# EAGLE board motor_driver_ver3.9 (EAGLE 6.2)
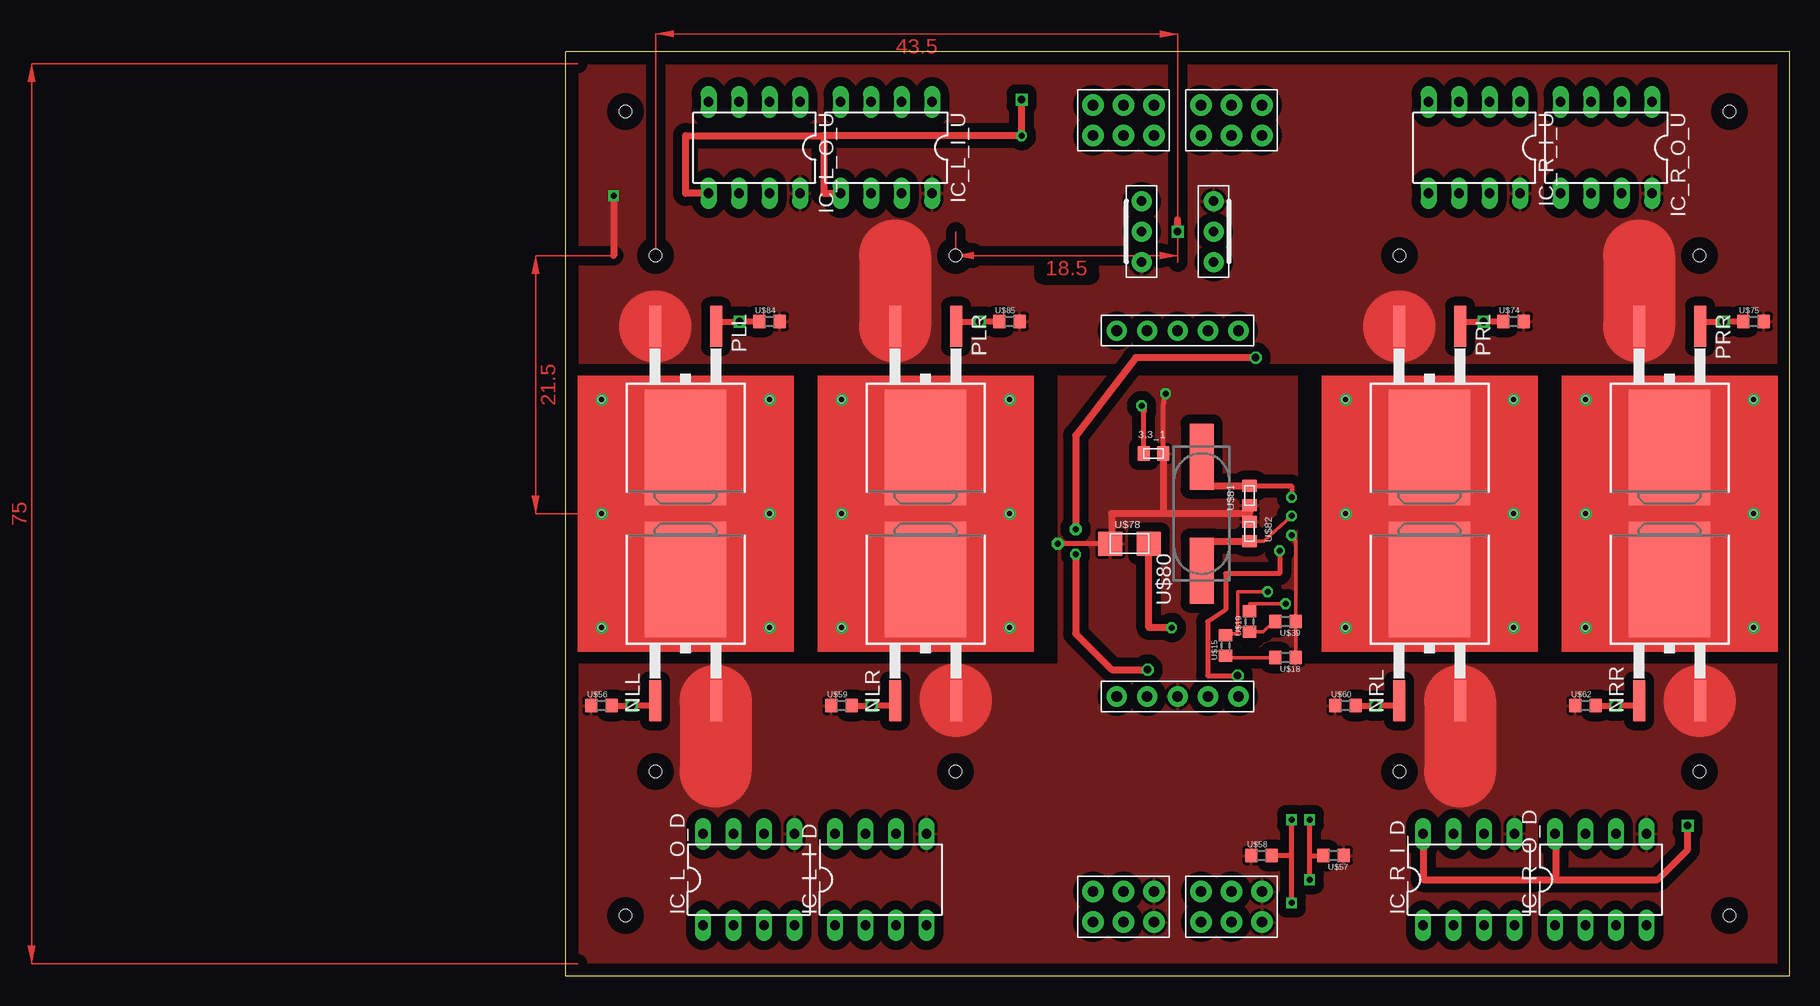
[diagram p0: board, top side]
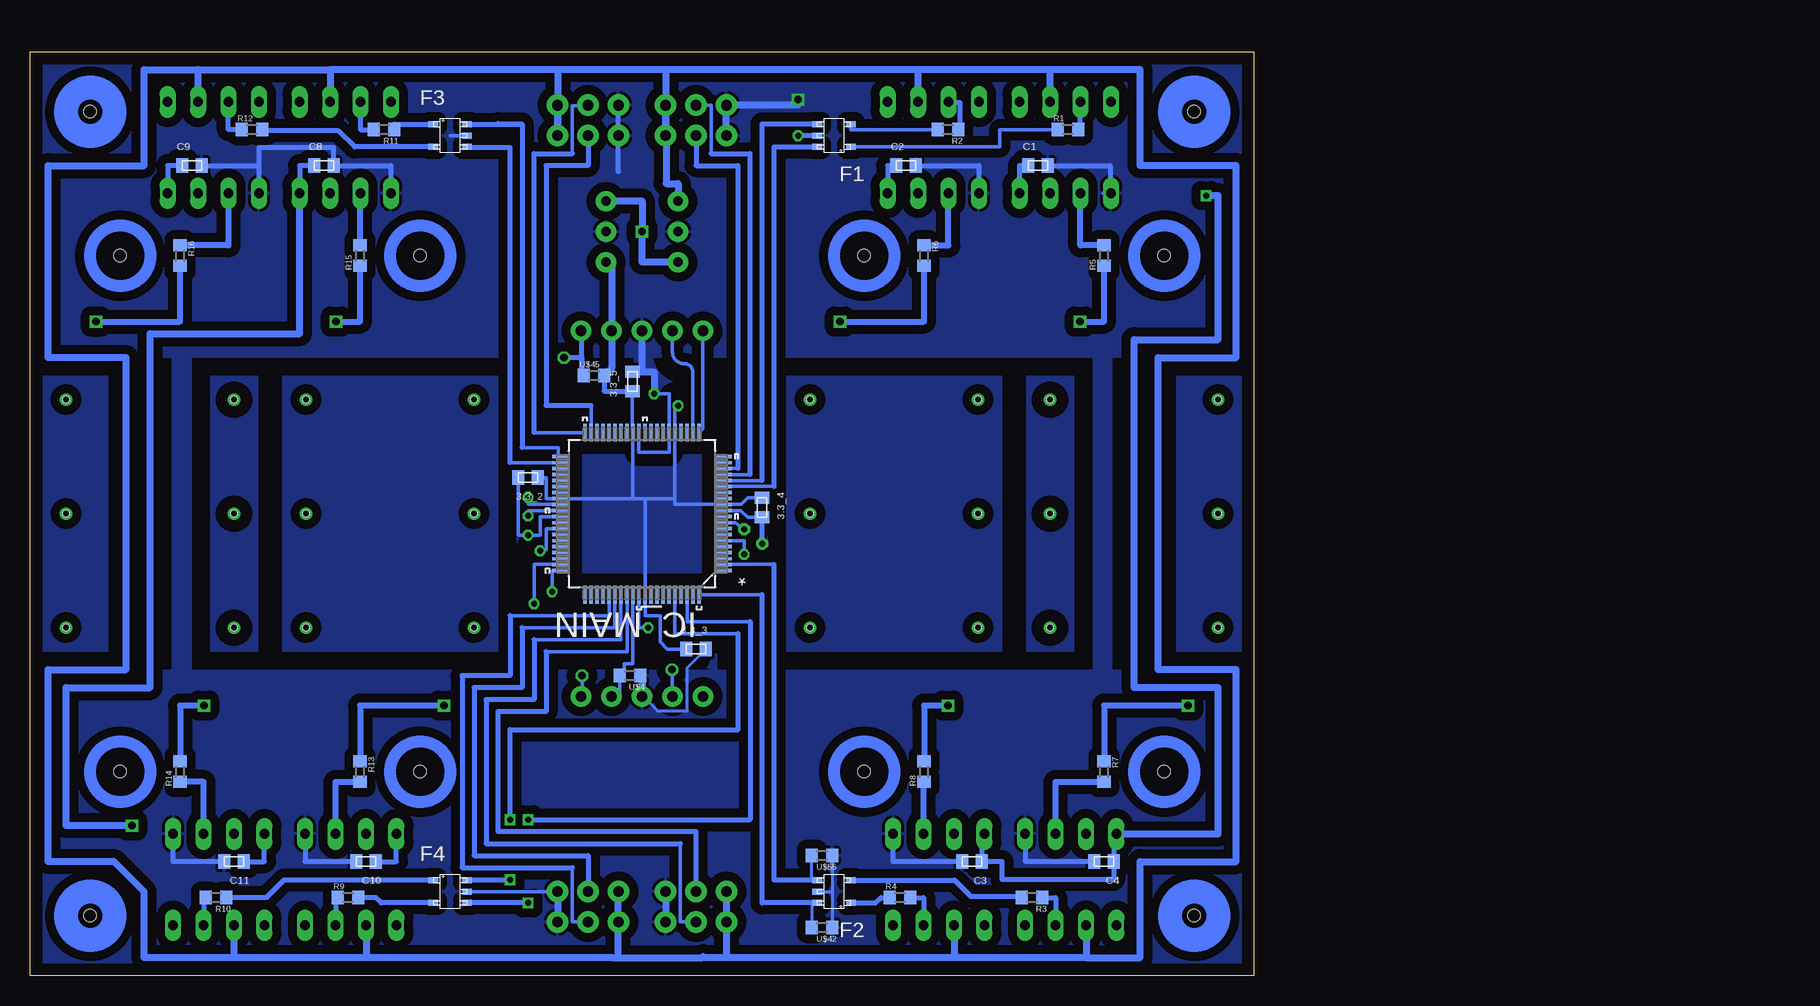
[diagram p1: board, bottom side, seen from below]

Size 102 x 77 mm. Coordinates in mm from the lower left corner, seen from the top.
Outline: 0,0 102,0 102,77 0,77 0,0
Copper layers (1*16): Top 0.035mm / dielectric 1.5mm / Bottom 0.035mm
Design rules: minimum track width 10mil, minimum drill 24mil, track to track 8mil, track to pad 8mil, pad to pad 8mil, via to via 8mil, smd to smd 8mil, copper to edge 40mil, drill to drill 8mil, minimum pad ring 10mil, minimum via ring 8mil, stop-mask expansion 4mil, vias tented up to drill 0mil, thermal gap 10mil
Holes 1 mm at 97,5 5,5 5,72 97,72 7.5,17 32.5,17 69.5,17 7.5,60 94.5,60 94.5,17 32.5,60 69.5,60
Holes 0.5 mm at 3,38.5 3,48 17,48 17,38.5 3,29 17,29 23,38.5 23,29 23,48 37,48 37,38.5 37,29 65,38.5 79,38.5 85,38.5 99,38.5 65,48 79,48 85,48 99,48 65,29 79,29 85,29 99,29

## Footprints (pad centres in the part's own frame; a part is rotated, then mirrored left to right if it is on the bottom)
1608 = smd 1 x 1.2: P$1 -0.8,0; P$2 0.8,0
CHP-5 = smd 0.5 x 0.8: 1 -0.95,-1.4; 2 0.95,-1.4; 3 -0.95,1.4; 4 0,1.4; 5 0.95,1.4
DIL08 = drill 0.813 long: 1 -2.54,-3.81; 2 0,-3.81; 3 2.54,-3.81; 4 5.08,-3.81; 5 5.08,3.81; 6 2.54,3.81; 7 0,3.81; 8 -2.54,3.81
QFP50P1400X1400X120-80N = smd 1.473 x 0.279: 1 -6.756,4.75; 2 -6.756,4.242; 3 -6.756,3.759; 4 -6.756,3.251; 5 -6.756,2.743; 6 -6.756,2.261; 7 -6.756,1.753; 8 -6.756,1.245; 9 -6.756,0.762; 10 -6.756,0.254; 11 -6.756,-0.254; 12 -6.756,-0.762; 13 -6.756,-1.245; 14 -6.756,-1.753; 15 -6.756,-2.261; 16 -6.756,-2.743; 17 -6.756,-3.251; 18 -6.756,-3.759; 19 -6.756,-4.242; 20 -6.756,-4.75; 41 6.756,-4.75; 42 6.756,-4.242; 43 6.756,-3.759; 44 6.756,-3.251; 45 6.756,-2.743; 46 6.756,-2.261; 47 6.756,-1.753; 48 6.756,-1.245; 49 6.756,-0.762; 50 6.756,-0.254; 51 6.756,0.254; 52 6.756,0.762; 53 6.756,1.245; 54 6.756,1.753; 55 6.756,2.261; 56 6.756,2.743; 57 6.756,3.251; 58 6.756,3.759; 59 6.756,4.242; 60 6.756,4.75 | smd 0.279 x 1.473: 21 -4.75,-6.756; 22 -4.242,-6.756; 23 -3.759,-6.756; 24 -3.251,-6.756; 25 -2.743,-6.756; 26 -2.261,-6.756; 27 -1.753,-6.756; 28 -1.245,-6.756; 29 -0.762,-6.756; 30 -0.254,-6.756; 31 0.254,-6.756; 32 0.762,-6.756; 33 1.245,-6.756; 34 1.753,-6.756; 35 2.261,-6.756; 36 2.743,-6.756; 37 3.251,-6.756; 38 3.759,-6.756; 39 4.242,-6.756; 40 4.75,-6.756; 61 4.75,6.756; 62 4.242,6.756; 63 3.759,6.756; 64 3.251,6.756; 65 2.743,6.756; 66 2.261,6.756; 67 1.753,6.756; 68 1.245,6.756; 69 0.762,6.756; 70 0.254,6.756; 71 -0.254,6.756; 72 -0.762,6.756; 73 -1.245,6.756; 74 -1.753,6.756; 75 -2.261,6.756; 76 -2.743,6.756; 77 -3.251,6.756; 78 -3.759,6.756; 79 -4.242,6.756; 80 -4.75,6.756
TO-263 = smd 1 x 3.4: 1 -2.54,-6.6; 2 2.54,-6.6 | smd 6.8 x 9.6: 3 0,3.5
1608' = smd 1 x 1.1: 1 -0.85,0; 2 0.85,0
PIN_HEADER_5 = drill 0.9 pad 1.676: 1 -5.08,0; 2 -2.54,0; 3 0,0; 4 2.54,0; 5 5.08,0
PIN_HEADER_3*2 = drill 0.9 pad 1.778: P$1 -2.54,0; P$2 0,0; P$3 2.54,0; P$4 -2.54,-2.54; P$5 0,-2.54; P$6 2.54,-2.54
ＨＳＩＰ３ = drill 0.8 pad 1.676: 1 -2.54,0; 2 0,0; 3 2.54,0
3216 = smd 2 x 2: P$1 -1.6,0; P$2 1.6,0
CSM-7X-DU = smd 5.5 x 2: 1 -4.75,0; 2 4.75,0

## Placement (x,y rotation side)
3.3_1  1608  [1608]  49,43.5 0 top
3.3_2  1608  [1608]  60.5,41.5 180 bottom
3.3_3  1608  [1608]  46.5,27.2 0 bottom
3.3_4  1608  [1608]  41,39 270 bottom
3.3_5  1608  [1608]  51.8,49.5 90 bottom
C1  1608  [1608]  18,67.5 0 bottom
C2  1608  [1608]  29,67.5 0 bottom
C3  1608  [1608]  23.5,9.5 180 bottom
C4  1608  [1608]  12.5,9.5 180 bottom
C8  1608  [1608]  77.5,67.5 0 bottom
C9  1608  [1608]  88.5,67.5 0 bottom
C10  1608  [1608]  74,9.5 180 bottom
C11  1608  [1608]  85,9.5 180 bottom
F1  CPH5617  [CHP-5]  35,70 90 bottom
F2  CPH5617  [CHP-5]  35,7 90 bottom
F3  CPH5617  [CHP-5]  67,70 270 bottom
F4  CPH5617  [CHP-5]  67,7 270 bottom
IC_L_I_D  TLP351  [DIL08]  25,8 0 top
IC_L_I_U  TLP351  [DIL08]  28,69 180 top
IC_L_O_D  TLP351  [DIL08]  14,8 0 top
IC_L_O_U  TLP351  [DIL08]  17,69 180 top
IC_MAIN  DSPIC33FJ64MC508IP  [QFP50P1400X1400X120-80N]  51,38.5 180 bottom
IC_R_I_D  TLP351  [DIL08]  74,8 0 top
IC_R_I_U  TLP351  [DIL08]  77,69 180 top
IC_R_O_D  TLP351  [DIL08]  85,8 0 top
IC_R_O_U  TLP351  [DIL08]  88,69 180 top
NLL  FDB8441  [TO-263]  10,29.5 0 top
NLR  FDB8441  [TO-263]  30,29.5 0 top
NRL  FDB8441  [TO-263]  72,29.5 0 top
NRR  FDB8441  [TO-263]  92,29.5 0 top
PLL  SUM110P06  [TO-263]  10,47.5 180 top
PLR  SUM110P06  [TO-263]  30,47.5 180 top
PRL  SUM110P06  [TO-263]  72,47.5 180 top
PRR  SUM110P06  [TO-263]  92,47.5 180 top
R1  RESISTOR__SMD  [1608']  15.5,70.5 0 bottom
R2  RESISTOR__SMD  [1608']  25.5,70.5 180 bottom
R3  RESISTOR__SMD  [1608']  18.5,6.5 180 bottom
R4  RESISTOR__SMD  [1608']  29.5,6.5 0 bottom
R5  RESISTOR__SMD  [1608']  12.5,60 90 bottom
R6  RESISTOR__SMD  [1608']  27.5,60 270 bottom
R7  RESISTOR__SMD  [1608']  12.5,17 270 bottom
R8  RESISTOR__SMD  [1608']  27.5,17 90 bottom
R9  RESISTOR__SMD  [1608']  75.5,6.5 0 bottom
R10  RESISTOR__SMD  [1608']  86.5,6.5 180 bottom
R11  RESISTOR__SMD  [1608']  72.5,70.5 180 bottom
R12  RESISTOR__SMD  [1608']  83.5,70.5 0 bottom
R13  RESISTOR__SMD  [1608']  74.5,17 270 bottom
R14  RESISTOR__SMD  [1608']  89.5,17 90 bottom
R15  RESISTOR__SMD  [1608']  74.5,60 90 bottom
R16  RESISTOR__SMD  [1608']  89.5,60 270 bottom
U$1  PIN_HEADER_5  [PIN_HEADER_5]  51,53.74 180 top
U$4  RESISTOR__SMD  [1608']  52,25 180 bottom
U$5  PIN_HEADER_32  [PIN_HEADER_3*2]  46.5,70 180 top
U$15  RESISTOR__SMD  [1608']  55,27.5 90 top
U$18  RESISTOR__SMD  [1608']  60,26.5 180 top
U$19  RESISTOR__SMD  [1608']  57,29.5 90 top
U$20  PIN_HEADER_32  [PIN_HEADER_3*2]  55.5,70 180 top
U$39  RESISTOR__SMD  [1608']  60,29.5 180 top
U$42  RESISTOR__SMD  [1608']  36,4 180 bottom
U$45  RESISTOR__SMD  [1608']  55,50 0 bottom
U$47  TA48M05  [ＨＳＩＰ３]  48,62 90 top
U$51  TA48M033  [ＨＳＩＰ３]  54,62 270 top
U$55  RESISTOR__SMD  [1608']  36,10 180 bottom
U$56  RESISTOR__SMD  [1608']  3,22.5 0 top
U$57  RESISTOR__SMD  [1608']  64,10 180 top
U$58  RESISTOR__SMD  [1608']  58,10 0 top
U$59  RESISTOR__SMD  [1608']  23,22.5 0 top
U$60  RESISTOR__SMD  [1608']  65,22.5 0 top
U$62  RESISTOR__SMD  [1608']  85,22.5 0 top
U$64  PIN_HEADER_5  [PIN_HEADER_5]  51,23.26 180 top
U$66  PIN_HEADER_32  [PIN_HEADER_3*2]  46.5,7 0 top
U$67  PIN_HEADER_32  [PIN_HEADER_3*2]  55.5,7 0 top
U$74  RESISTOR__SMD  [1608']  79,54.5 0 top
U$75  RESISTOR__SMD  [1608']  99,54.5 0 top
U$78  3216  [3216]  47,36 0 top
U$80  CSM-7X-DU  [CSM-7X-DU]  53,38.5 90 top
U$81  1608  [1608]  57,40 90 top
U$82  1608  [1608]  57,37 270 top
U$84  RESISTOR__SMD  [1608']  17,54.5 0 top
U$85  RESISTOR__SMD  [1608']  37,54.5 0 top

## Library data of the parts
3.3_1-3.3_5 C1-C4 C8-C11 U$78 U$81 U$82 = 02_C
F1-F4 NLL NLR NRL NRR PLL PLR PRL PRR = 06_FET
IC_L_I_D IC_L_I_U IC_L_O_D IC_L_O_U IC_R_I_D IC_R_I_U IC_R_O_D IC_R_O_U U$47 U$51 = 04_IC
IC_MAIN = 07_PIC
R1-R16 U$4 U$15 U$18 U$19 U$39 U$42 U$45 U$55-U$60 U$62 U$74 U$75 U$84 U$85 = 01_R
U$1 U$5 U$20 U$64 U$66 U$67 = 08_CONECTOR
U$80 = CRYSTAL; OC_FARNELL: unknown; OC_NEWARK: unknown

## Nets
+3.3V: 3.3_1.P$1 3.3_2.P$1 3.3_3.P$1 3.3_4.P$1 3.3_5.P$1 IC_MAIN.12 IC_MAIN.25 IC_MAIN.32 IC_MAIN.48 IC_MAIN.71 U$1.2 U$45.2 U$51.3
+5V: IC_L_I_D.2 IC_L_I_U.2 IC_L_O_D.2 IC_L_O_U.2 IC_R_I_D.2 IC_R_I_U.2 IC_R_O_D.2 IC_R_O_U.2 U$5.P$1 U$5.P$4 U$20.P$1 U$20.P$4 U$47.3 U$66.P$1 U$66.P$4 U$67.P$1 U$67.P$4
+16.8V: C1.P$1 C2.P$1 C3.P$1 C4.P$1 C8.P$1 C9.P$1 C10.P$1 C11.P$1 IC_L_I_D.8 IC_L_I_U.8 IC_L_O_D.8 IC_L_O_U.8 IC_R_I_D.8 IC_R_I_U.8 IC_R_O_D.8 IC_R_O_U.8 PLL.2 PLR.2 PRL.2 PRR.2 U$47.1 U$51.1 U$74.2 U$75.2 U$84.2 U$85.2
AN9: IC_MAIN.28
AN15: IC_MAIN.36
GND: 3.3_1.P$2 3.3_2.P$2 3.3_3.P$2 3.3_4.P$2 3.3_5.P$2 C1.P$2 C2.P$2 C3.P$2 C4.P$2 C8.P$2 C9.P$2 C10.P$2 C11.P$2 F1.4 F2.4 F3.4 F4.4 IC_L_I_D.5 IC_L_I_U.5 IC_L_O_D.5 IC_L_O_U.5 IC_MAIN.11 IC_MAIN.26 IC_MAIN.31 IC_MAIN.51 IC_R_I_D.5 IC_R_I_U.5 IC_R_O_D.5 IC_R_O_U.5 NLL.2 NLR.2 NRL.2 NRR.2 U$1.3 U$4.1 U$5.P$3 U$5.P$6 U$18.1 U$20.P$3 U$20.P$6 U$39.1 U$42.1 U$47.2 U$51.2 U$55.1 U$56.1 U$57.1 U$58.1 U$59.1 U$60.1 U$62.1 U$64.3 U$66.P$3 U$66.P$6 U$67.P$3 U$67.P$6 U$78.P$1 U$81.P$1 U$82.P$1
INPUT1: IC_MAIN.20
INPUT2: IC_MAIN.19
N$1: F2.1 R4.1
N$2: F2.2 R3.2
N$3: IC_L_O_D.3 R3.1
N$4: IC_L_I_D.3 R4.2
N$5: U$15.1 U$18.2
N$6: IC_MAIN.49 U$80.2 U$81.P$2
N$7: F1.1 R1.1
N$8: F1.2 R2.2
N$9: NLL.1 R7.1 U$56.2
N$10: NLR.1 R8.2 U$59.2
N$11: IC_L_O_D.6 R7.2
N$12: NLL.3 PLL.3
N$13: NLR.3 PLR.3
N$14: IC_L_I_D.6 R8.1
N$15: PLL.1 R5.1 U$84.1
N$16: IC_L_O_U.6 R5.2
N$17: IC_L_O_U.3 R1.2
N$18: IC_L_I_U.3 R2.1
N$19: U$19.1 U$39.2
N$21: PLR.1 R6.2 U$85.1
N$22: IC_L_I_U.6 R6.1
N$23: NRL.3 PRL.3
N$24: NRR.3 PRR.3
N$25: IC_R_I_D.3 R9.1
N$26: IC_R_O_D.3 R10.2
N$29: IC_R_I_U.3 R11.2
N$30: IC_R_O_U.3 R12.1
N$32: IC_MAIN.50 U$80.1 U$82.P$2
N$33: F4.1 R10.1
N$34: F4.2 R9.2
N$35: F3.1 R11.1
N$36: F3.2 R12.2
N$37: NRL.1 R13.1 U$60.2
N$38: IC_R_I_D.6 R13.2
N$39: NRR.1 R14.2 U$62.2
N$40: IC_R_O_D.6 R14.1
N$41: PRL.1 R15.1 U$74.1
N$42: IC_R_I_U.6 R15.2
N$43: PRR.1 R16.2 U$75.1
N$44: IC_R_O_U.6 R16.1
N$45: IC_MAIN.70 U$78.P$2
PGC1: IC_MAIN.21 U$1.5
PGD1: IC_MAIN.22 U$1.4
PWM1H: IC_MAIN.77
PWM1L: F4.3 IC_MAIN.76 U$57.2
PWM2H: IC_MAIN.79
PWM2L: F4.5 IC_MAIN.78 U$58.2
PWM3H: IC_MAIN.1
PWM3L: F2.3 IC_MAIN.80 U$42.2
PWM4H: IC_MAIN.3
PWM4L: F2.5 IC_MAIN.2 U$55.2
RA3: IC_MAIN.53 U$64.1
RB2: IC_MAIN.18 U$5.P$2
RB3: IC_MAIN.17 U$5.P$5
RB4: F1.5 IC_MAIN.16
RB5: F1.3 IC_MAIN.15
RB12: IC_MAIN.33
RB13: IC_MAIN.34
RB14: IC_MAIN.35
RC13: IC_MAIN.59 U$19.2
RC14: IC_MAIN.60 U$15.2
RD0: IC_MAIN.58
RD1: IC_MAIN.61
RD2: IC_MAIN.62
RD3: IC_MAIN.63
RD4: IC_MAIN.66 U$67.P$2
RD5: IC_MAIN.67 U$66.P$5
RD6: IC_MAIN.68 U$66.P$2
RD7: IC_MAIN.69 U$4.2 U$64.2
RD9: IC_MAIN.55
RD10: IC_MAIN.56
RD13: IC_MAIN.65 U$67.P$5
RD14: IC_MAIN.37
RD15: IC_MAIN.38
RF2: F3.5 IC_MAIN.42
RF3: F3.3 IC_MAIN.41
RF4: IC_MAIN.39 U$20.P$2
RF5: IC_MAIN.40 U$20.P$5
RG6: IC_MAIN.6 U$64.4
VPP: IC_MAIN.9 U$1.1 U$45.1

## Tracks (layer width: path | path; a pad name or v marks a point on that pad's centre or on a via)
+3.3V  (via drill 0.5)
  Top 0.4: 3.3_1.P$1 48.2,47 48.26,47 48.26,47.5 v48,47.5
  Bottom 0.28: 51.76,39.74 IC_MAIN.32 51.8,45.26 3.3_5.P$1 | 48.26,39.74 IC_MAIN.25 48.26,47.5 v48,47.5 | 48.26,39.74 50.75,39.74 | 50.75,39.74 51.76,39.74 | 48.26,39.74 48.26,39.26 IC_MAIN.12 42.74,39.26 42.2,39.8 3.3_4.P$1 | 50.75,39.74 IC_MAIN.71 50.75,30 49.5,30 49.5,27.8 48.9,27.2 3.3_3.P$1 | 51.76,39.74 IC_MAIN.48 59,39.74 59,41.5 3.3_2.P$1
  Bottom 0.4: U$45.2 54.15,48.7 3.3_5.P$1
  Bottom 0.6: U$45.2 53.54,50.61 U$1.2 53.54,59.46 U$51.3
  pour Bottom (isolate 1): 46,43.5 56,43.5 56,33.5 46,33.5
+5V
  Bottom 0.4: U$66.P$4 44,4.46 | U$5.P$1 49,70 | U$20.P$1 58,70
  Bottom 0.6: 53.5,1.5 53,1.5 | 53,1.5 46,1.5 | 46,1.5 45.92,1.58 | 53.54,1.5 74,1.5 | IC_R_I_D.2 74,1.5 | 74,1.5 85,1.5 | 85,1.5 IC_R_O_D.2 | 14,1.5 9.5,1.5 9.5,9.5 1.5,9.5 1.5,25.5 8,25.5 8,51.5 1.5,51.5 1.5,67.5 9.5,67.5 9.5,75.5 17,75.5 | IC_L_O_D.2 14,1.5 | 14,1.5 25,1.5 | IC_L_I_D.2 25,1.5 | 25,1.5 44,1.5 | 44,1.5 46,1.5 | 85,1.5 92.5,1.5 92.5,7 95,9.5 100.5,9.5 100.5,25.5 94,25.5 94,51.5 100.5,51.5 100.5,67.5 92.5,67.5 92.5,75.5 88,75.5 | 88,75.5 77,75.5 | IC_L_O_U.2 17,75.5 | 17,75.5 28,75.5 | IC_L_I_U.2 28,75.5 | 28,75.5 49,75.5 | 49,75.5 58,75.5 | 58,75.5 77,75.5 | 77,75.5 IC_R_I_U.2 | IC_R_O_U.2 88,75.5 | U$66.P$1 U$66.P$4 | 44,4.46 44,1.5 | U$5.P$1 U$5.P$4 | 49,75.5 49,70 49,66 48,66 U$47.3 | U$20.P$1 U$20.P$4 | 58,70 58,75.5 | 53,1.5 U$67.P$1 U$67.P$4
+16.8V  (via drill 0.5, 0.6 pad 1)
  Top 0.6: v4,65 4,60 | IC_R_I_D.8 71.46,8 82.5,8 | 82.5,8 91,8 93.5,10.5 v93.5,12.5 | IC_R_O_D.8 82.5,11.81 82.5,8 | v51,62 51,63
  Top 6: PLL.2 7.5,54.1 | 27.46,60 PLR.2 | PRL.2 69.5,54.1 | 89.46,60 PRR.2
  Bottom 0.4: IC_L_O_D.8 11.7,11.57 C4.P$1 11.7,8 21,8 21,9.5 C3.P$1 22.7,11.57 IC_L_I_D.8 | C1.P$1 19.54,67.5 IC_L_O_U.8 | C2.P$1 30.54,67.5 IC_L_I_U.8 | C9.P$1 90.54,67.5 IC_R_O_U.8 | C10.P$1 71.46,9.5 IC_R_I_D.8 | C8.P$1 79.54,67.5 IC_R_I_U.8 | C11.P$1 82.46,9.5 IC_R_O_D.8
  Bottom 0.6: IC_L_O_D.8 3,11.81 3,24 10,24 10,53 3,53 3,65 v4,65 | v93.5,12.5 99,12.5 99,24 92,24 92,53.5 79.54,53.5 IC_R_I_U.8 | U$47.1 51,59.46 v51,62 51,64.54 U$51.1
  pour Top (isolate 0.75): 1,76 101,76 101,51 1,51
GND  (via drill 0.5, 0.5 pad 1, 0.6 pad 1)
  Top 0.28: U$81.P$1 U$82.P$1
  Top 0.3: v60.5,36.7 60.85,36.15 U$39.1 U$18.1
  Top 0.4: 3.3_1.P$2 49.8,47.5 v50,48.5 | 45.5,36 v41,36
  Top 0.6: IC_L_O_U.5 10,65.19 10,70 21.5,70 | 21.5,70 21.5,65.19 IC_L_I_U.5 | U$78.P$1 45.5,36 45.5,38.5 49.8,38.5 | U$81.P$1 57,38.5 49.8,38.5 | 21.5,70 v38,70 v38,73 | 3.3_1.P$2 49.8,38.5
  Top 6: NLL.2 12.5,22.9 12.5,17 | NRL.2 74.54,17 | 94.5,22.9 NRR.2 | NLR.2 32.54,23 32.5,23
  Bottom 0.254: 12.6,65.2 12.58,65.19 12.5,65.2 12.15,65.2 IC_L_O_U.5 | 35.15,7 U$42.1 | F2.4 35.15,7 | 3.3_3.P$2 47.25,25.65 47.25,22.05 49.7,22.05 50.75,23.1 U$64.3 | U$55.1 35.15,7
  Bottom 0.28: IC_MAIN.31 51.25,43.6 48.74,43.6 IC_MAIN.26 48.74,48.5 v50,48.5 50.24,48.5 | IC_MAIN.51 59.5,38.25 59.5,36.7 v60.5,36.7 61.3,36.7 3.3_2.P$2 | IC_MAIN.11 42.75,38.75 42.2,38.2 3.3_4.P$2 | F3.4 67,70
  Bottom 0.3: F4.4 U$67.P$3
  Bottom 0.4: C4.P$2 19,9.5 19.08,9.58 IC_L_O_D.5 | C1.P$2 12,67.5 12,65.19 IC_L_O_U.5 | C2.P$2 22.92,67.5 IC_L_I_U.5 | C9.P$2 82.92,67.5 | 82.92,67.5 IC_R_O_U.5 | 82.92,67.5 82.92,69 76.7,69 C8.P$2 71.92,67.5 IC_R_I_U.5 | C11.P$2 90.08,9.5 IC_R_O_D.5 | C10.P$2 79.08,9.5 IC_R_I_D.5 | C3.P$2 30.08,9.5 IC_L_I_D.5 | U$20.P$6 U$20.P$3 52.96,67 53,67 | 3.3_5.P$2 51,50.3 | F1.4 v38,70 | v41,36 3.3_4.P$2
  Bottom 0.6: U$66.P$3 U$66.P$6 | U$67.P$3 U$67.P$6 | U$5.P$3 U$5.P$6 38,72.54 v38,73 | 51,50.3 U$1.3 | 3.3_5.P$2 50,50.3 v50,48.5 | U$4.1 51,25 U$64.3
  pour Bottom (isolate 1.5, rank 2): 1,76 101,76 101,1 1,1
  pour Top (isolate 0.75): 1,20 101,20 101,1 1,1
  pour Top (isolate 0.75): 41,20 61,20 61,50 41,50
  pour Top (isolate 0.75): 1,26 101,26 101,20 1,20
  pour Bottom (isolate 0.75): 1,25.5 1,1 101,1 101,25.5
  pour Bottom (isolate 0.75): 1,76 1,51.5 101,51.5 101,76
LBETA
  pour Bottom (isolate 0.01): 1,50 6.5,50 6.5,27 1,27
N$1
  Bottom 0.4: F2.1 31.55,6.05 31.1,6.5 R4.1
N$2
  Bottom 0.3: 19.45,6.6 R3.2
  Bottom 0.4: F2.2 24.95,7.95 23.6,6.6 19.45,6.6
N$3
  Bottom 0.4: R3.1 16.54,6.5 IC_L_O_D.3
N$4
  Bottom 0.4: R4.2 27.54,6.5 IC_L_I_D.3
N$5
  Top 0.28: U$15.1 55.15,26.5 U$18.2
N$6  (via drill 0.5)
  Top 0.4: U$81.P$2 60.5,40.8 v60.5,39.85
  Top 0.6: U$80.2 53,40.8 U$81.P$2
  Bottom 0.28: v60.5,39.85 60.5,39.26 IC_MAIN.49
N$7
  Bottom 0.3: F1.1 21.2,69.05 21.2,70.5 R1.1
N$8
  Bottom 0.3: F1.2 33.6,70.5 R2.2
N$9  (via drill 0.6)
  Top 0.5: NLL.1 7.46,22.5 v5.5,22.5 U$56.2
  Bottom 0.5: v5.5,22.5 12.5,22.5 R7.1
N$10  (via drill 0.6)
  Top 0.5: NLR.1 27.46,22.5 v25.5,22.5 U$59.2
  Bottom 0.5: v25.5,22.5 27.5,22.5 R8.2
N$11
  Bottom 0.5: IC_L_O_D.6 16.54,16.15 R7.2
N$12
  Top 0.254: PLL.3 NLL.3
N$13
  Top 0.254: PLR.3 NLR.3
N$14
  Bottom 0.5: IC_L_I_D.6 27.54,16.15 R8.1
N$15  (via drill 0.6)
  Top 0.5: PLL.1 12.54,54.5 v14.5,54.5 U$84.1
  Bottom 0.5: v14.5,54.5 12.5,54.5 R5.1
N$16
  Bottom 0.5: R5.2 14.46,60.85 IC_L_O_U.6
N$17
  Bottom 0.4: R1.2 14.46,70.5 IC_L_O_U.3
N$18
  Bottom 0.4: R2.1 24.5,70.5 24.5,72.75 25.46,72.75 IC_L_I_U.3
N$19
  Top 0.3: U$19.1 58.15,28.65 59,29.5 U$39.2
N$20  (via drill 0.6 pad 0.41)
  other vias: 5,72
N$21  (via drill 0.6)
  Top 0.5: PLR.1 32.94,54.5 v34.5,54.5 U$85.1
  Bottom 0.5: v34.5,54.5 27.5,54.5 R6.2
N$22
  Bottom 0.5: R6.1 25.46,60.85 IC_L_I_U.6
N$23
  Top 0.254: PRL.3 NRL.3
N$24
  Top 0.254: PRR.3 NRR.3
N$25
  Bottom 0.4: R9.1 76.54,6.5 IC_R_I_D.3
N$26
  Bottom 0.4: R10.2 87.54,6.5 IC_R_O_D.3
N$27  (via drill 0.6 pad 0.41)
  other vias: 97,72
N$29
  Bottom 0.4: IC_R_I_U.3 74.46,70.5 R11.2
N$30
  Bottom 0.4: R12.1 85.46,70.5 IC_R_O_U.3
N$31
  pour Bottom (isolate 0.406): 63,50 81,50 81,27 63,27
N$32  (via drill 0.5)
  Top 0.305: v60.5,38.3 58.2,36.2 U$82.P$2
  Top 0.6: U$80.1 53,36.2 U$82.P$2
  Bottom 0.28: IC_MAIN.50 60.5,38.75 v60.5,38.3
N$33
  Bottom 0.4: F4.1 80.85,7.95 82.3,6.5 R10.1
N$34
  Bottom 0.4: F4.2 72.75,6.05 73.2,6.5 R9.2
N$35
  Bottom 0.3: R11.1 71.65,70.95
  Bottom 0.4: 71.65,70.95 F3.1
N$36
  Bottom 0.3: 82.55,70.4 R12.2
  Bottom 0.4: F3.2 74.95,69.05 76.3,70.4 82.55,70.4
N$37  (via drill 0.6)
  Top 0.5: NRL.1 69.46,22.5 v67.5,22.5 U$60.2
  Bottom 0.5: v67.5,22.5 74.5,22.5 R13.1
N$38
  Bottom 0.5: IC_R_I_D.6 76.54,16.15 R13.2
N$39  (via drill 0.6)
  Top 0.5: NRR.1 89.46,22.5 v87.5,22.5 U$62.2
  Bottom 0.5: v87.5,22.5 89.5,22.5 R14.2
N$40
  Bottom 0.5: IC_R_O_D.6 87.54,16.15 R14.1
N$41  (via drill 0.6)
  Top 0.5: PRL.1 74.54,54.5 v76.5,54.5 U$74.1
  Bottom 0.5: v76.5,54.5 74.5,54.5 R15.1
N$42
  Bottom 0.5: R15.2 74.46,60.85 IC_R_I_U.6
N$43  (via drill 0.6 pad 1)
  Top 0.5: PRR.1 94.54,54.5 v96.5,54.5 U$75.1
  Bottom 0.5: v96.5,54.5 89.5,54.5 R16.2
N$44
  Bottom 0.5: IC_R_O_U.6 85.46,60.85 R16.1
N$45  (via drill 0.5)
  Top 0.6: v50.5,29 48.6,29 U$78.P$2
  Bottom 0.28: IC_MAIN.70 51.25,29 v50.5,29
N$46  (via drill 0.6)
  other vias: 14.5,54.5
N$47  (via drill 0.6)
  other vias: 34.5,54.5
N$48  (via drill 0.6)
  other vias: 76.5,54.5
N$49  (via drill 0.6)
  other vias: 96.5,54.5
N$50  (via drill 0.6)
  other vias: 87.5,22.5
N$51  (via drill 0.6)
  other vias: 67.5,22.5
N$52  (via drill 0.6)
  other vias: 25.5,22.5
N$53  (via drill 0.6)
  other vias: 5.5,22.5
N$56
  pour Bottom (isolate 0.406): 21,50 39,50 39,27 21,27
N$57
  pour Bottom (isolate 1): 19,50 15,50 15,27 19,27
N$58  (via drill 0.6 pad 0.41)
  other vias: 97,5
N$59  (via drill 0.6 pad 0.41)
  other vias: 5,5
N$60  (via drill 0.6 pad 0.41)
  other vias: 37,48
N$61  (via drill 0.6 pad 0.41)
  other vias: 37,29
N$62  (via drill 0.6 pad 0.41)
  other vias: 23,29
N$63  (via drill 0.6 pad 0.41)
  other vias: 23,48
N$64  (via drill 0.6 pad 0.41)
  other vias: 17,48
N$65  (via drill 0.6 pad 0.41)
  other vias: 17,29
N$66  (via drill 0.6 pad 0.41)
  other vias: 3,48
N$67  (via drill 0.6 pad 0.41)
  other vias: 3,29
N$68  (via drill 0.6 pad 0.41)
  other vias: 99,48
N$69  (via drill 0.6 pad 0.41)
  other vias: 99,29
N$70  (via drill 0.6 pad 0.41)
  other vias: 85,29
N$71  (via drill 0.6 pad 0.41)
  other vias: 85,48
N$72  (via drill 0.6 pad 0.41)
  other vias: 79,48
N$73  (via drill 0.6 pad 0.41)
  other vias: 79,29
N$74  (via drill 0.6 pad 0.41)
  other vias: 65,29
N$75  (via drill 0.6 pad 0.41)
  other vias: 65,48
N$76  (via drill 0.6 pad 0.41)
  other vias: 37,38.5
N$77  (via drill 0.6 pad 0.41)
  other vias: 65,38.5
N$78  (via drill 0.6 pad 0.41)
  other vias: 79,38.5
N$79  (via drill 0.6 pad 0.41)
  other vias: 85,38.5
N$80  (via drill 0.6 pad 0.41)
  other vias: 99,38.5
N$81  (via drill 0.6 pad 0.41)
  other vias: 23,38.5
N$82  (via drill 0.6 pad 0.41)
  other vias: 17,38.5
N$83  (via drill 0.6 pad 0.41)
  other vias: 3,38.5
N$84  (via drill 0.6 pad 1)
  other vias: 32.5,60
N$85  (via drill 0.6 pad 1)
  other vias: 7.5,60
N$86  (via drill 0.6 pad 1)
  other vias: 69.5,60
N$87  (via drill 0.6 pad 1)
  other vias: 94.5,60
N$88  (via drill 0.6 pad 1)
  other vias: 94.5,17
N$89  (via drill 0.6 pad 1)
  other vias: 69.5,17
N$90  (via drill 0.6 pad 1)
  other vias: 32.5,17
N$91  (via drill 0.6 pad 1)
  other vias: 7.5,17
PGC1
  Bottom 0.28: U$1.5 45.92,45.59 IC_MAIN.21
PGD1
  Bottom 0.3: U$1.4 48.46,51.96 arc-90 47.5,51 arc90 46.76,50.26 IC_MAIN.22
PWM1L  (via drill 0.5)
  Top 0.4: v62,8 62,10 | 62,10 v62,13 | 62,10 U$57.2
  Bottom 0.28: 43,28.5 48.26,28.5 IC_MAIN.76
  Bottom 0.4: F4.3 65.6,8 v62,8 | v62,13 62,20.5 43,20.5 43,28.5
PWM2L  (via drill 0.5)
  Top 0.4: v60.5,6.05 60.5,10 | 60.5,10 v60.5,13 | 60.5,10 U$58.2
  Bottom 0.28: IC_MAIN.78 47.24,29.5 42,29.5
  Bottom 0.4: 42,29.5 42,13 v60.5,13 | v60.5,6.05 F4.5
PWM3L
  Bottom 0.254: 36.85,6.05 U$42.2
  Bottom 0.28: IC_MAIN.80 41,31.74
  Bottom 0.4: F2.3 36.85,6.05 41,6.05 41,31.74
PWM4L
  Bottom 0.254: 36.85,7.95 U$55.2
  Bottom 0.28: IC_MAIN.2 40,34.26
  Bottom 0.4: F2.5 36.85,7.95 40,7.95 40,34.26
RA3  (via drill 0.5, 0.6)
  Top 0.4: v59.5,35.4 59.5,33.5 55,33.5 55,30.5 53.5,29.5 53.5,25 v56,25
  Bottom 0.28: IC_MAIN.53 59,37.26 59,35.5 v59.5,35.4 | v56,25 56,23.34 U$64.1
RB2
  Bottom 0.28: IC_MAIN.18 43,42.26
  Bottom 0.4: U$5.P$2 46.5,67.5 43,67.5 43,42.26
RB3
  Bottom 0.28: IC_MAIN.17 42,41.75
  Bottom 0.305: U$5.P$5 45.25,72.54 45.25,68.5
  Bottom 0.4: 45.25,68.5 42,68.5 42,41.75
RB4
  Bottom 0.28: IC_MAIN.16 41,41.24
  Bottom 0.4: F1.5 41,70.95 41,41.24
RB5
  Bottom 0.28: IC_MAIN.15 40,40.76
  Bottom 0.4: 40,40.76 40,69.05 F1.3
RBETA
  pour Bottom (isolate 0.5): 95.5,50 101,50 101,27 95.5,27
RC13  (via drill 0.5)
  Top 0.28: v60,31 57,31 U$19.2
  Bottom 0.28: IC_MAIN.59 60,34.26 v60,31
RC14  (via drill 0.5)
  Top 0.28: v58.5,32 56,32 56,28.5 55,28.5 U$15.2
  Bottom 0.28: IC_MAIN.60 58.5,33.75 v58.5,32
RD4
  Bottom 0.28: IC_MAIN.66 53.26,29 61,29
  Bottom 0.4: 61,29 61,24 65,24 65,10 55.5,10 U$67.P$2
RD5
  Bottom 0.28: IC_MAIN.67 52.75,28 60,28
  Bottom 0.305: 47.8,11 47.8,4.5 46.5,4.5
  Bottom 0.4: 47.8,11 64,11 64,23 60,23 60,28 | 46.5,4.5 U$66.P$5
RD6
  Bottom 0.28: IC_MAIN.68 52.24,27 59,27
  Bottom 0.4: U$66.P$2 46.5,12 63,12 63,22 59,22 59,27
RD7
  Bottom 0.28: U$64.2 52.85,23.26 U$4.2 52.5,25 52.5,26 51.76,26 IC_MAIN.69
RD13
  Bottom 0.28: IC_MAIN.65 53.74,30 62,30
  Bottom 0.305: 56.8,9 56.8,4.5 55.5,4.5
  Bottom 0.4: 62,30 62,25 66,25 66,9 56.8,9 | 55.5,4.5 U$67.P$5
RF2
  Bottom 0.28: 62,42.74 IC_MAIN.42
  Bottom 0.4: 62,42.74 62,69 65.6,69 F3.5
RF3
  Bottom 0.28: 61,44 58,44 58,43.25 IC_MAIN.41
  Bottom 0.4: F3.3 61,70.95 | 61,70.95 63,71 | 61,70.95 61,44
RF4
  Bottom 0.28: 55.24,47.5 IC_MAIN.39
  Bottom 0.4: 55.24,47.5 59,47.5 59,67.5 55.5,67.5 U$20.P$2
RF5
  Bottom 0.28: 60,45.26 IC_MAIN.40
  Bottom 0.305: 56.8,68.5 56.8,72.5 55.5,72.5
  Bottom 0.4: 60,45.26 60,68.5 56.8,68.5 | 55.5,72.5 U$20.P$5
RG6  (via drill 0.5, 0.6)
  Top 0.6: v42.5,35.1 42.5,28.5 45.5,25.5 v48.5,25.5
  Bottom 0.28: IC_MAIN.6 42.5,36.24 v42.5,35.1 | v48.5,25.5 48.46,25.46 U$64.4
TESTR2
  pour Bottom (isolate 1): 83,50 87,50 87,27 83,27
VPP  (via drill 0.5 pad 1, 0.6)
  Top 0.6: v42.5,37.2 42.5,45 47.5,51.5 v57.5,51.5
  Bottom 0.28: v42.5,37.2 43.24,37.74 IC_MAIN.9
  Bottom 0.4: U$1.1 56.08,50.23 U$45.1 56,50 56,51.5 v57.5,51.5
(copper drawn outside any net)
  shapes: Bottom circle x12, Top area x8

## Text on the board
bDocu: (´・ω・`)
SKY: (´・ω・`) | Ver3.4